# EAGLE board signal-board_v1_23 (EAGLE 7.6.0)
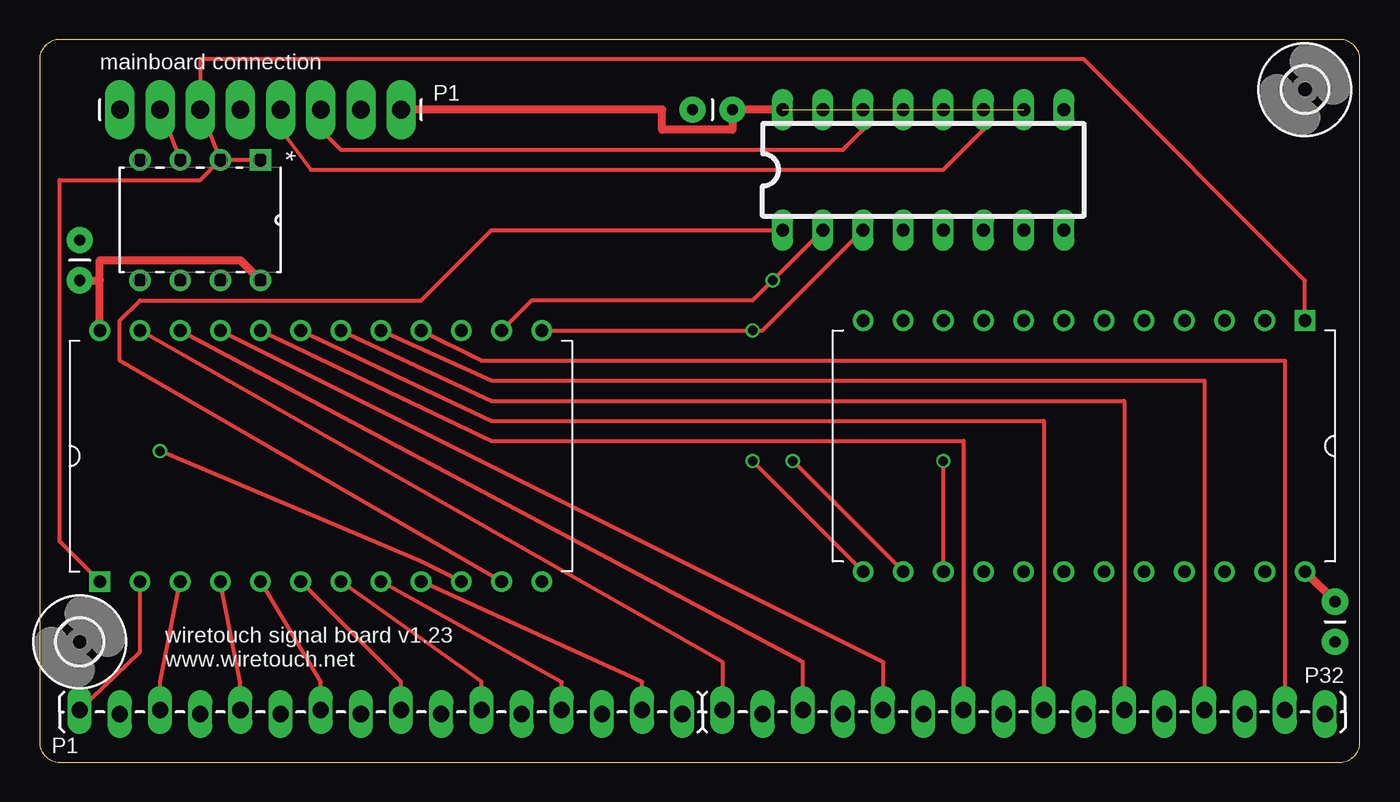
[diagram p0: board, top side]
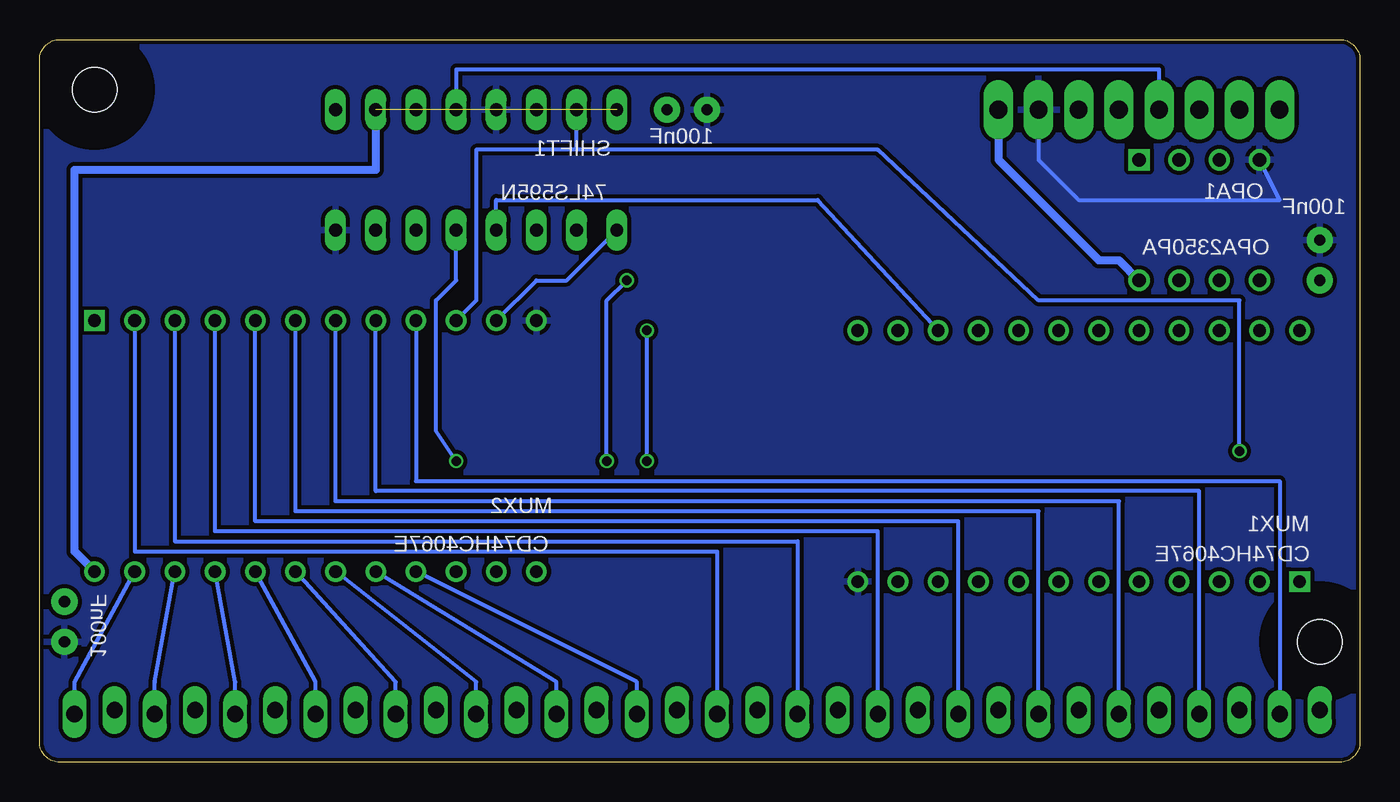
[diagram p1: board, bottom side, seen from below]

Size 83.49 x 45.71 mm. Coordinates in mm from the lower left corner, seen from the top.
Outline: 0,44.44 0,1.27 arc90 1.27,0 82.22,0 arc90 83.49,1.27 83.49,44.44 arc90 82.22,45.71 1.27,45.71 arc90 0,44.44
Copper layers (1*16): Top 0.035mm / dielectric 1.5mm / Bottom 0.035mm
Design rules "Fusion_eagle_rule_v1.1": minimum track width 6mil, minimum drill 12mil, track to track 6mil, track to pad 6mil, pad to pad 6mil, via to via 6mil, smd to smd 0mil, copper to edge 10mil, drill to drill 10mil, minimum pad ring 10mil, minimum via ring 6mil, stop-mask expansion 2mil, vias tented up to drill 100mil, thermal gap 10mil

## Footprints (pad centres in the part's own frame; a part is rotated, then mirrored left to right if it is on the bottom)
CAP-PTH-SMALL = drill 0.7 pad 1.651: 1 0,0; 2 2.54,0
1X08_LONGPADS = drill 1.118 pad 1.88 long: 1 0,0; 2 2.54,0; 3 5.08,0; 4 7.62,0; 5 10.16,0; 6 12.7,0; 7 15.24,0; 8 17.78,0
PDIP24-WIDE-CD74HC4067E = drill 0.8 square: 1 0,0 | drill 0.8: 2 2.54,0; 3 5.08,0; 4 7.62,0; 5 10.16,0; 6 12.7,0; 7 15.24,0; 8 17.78,0; 9 20.32,0; 10 22.86,0; 11 25.4,0; 12 27.94,0; 13 27.94,15.875; 14 25.4,15.875; 15 22.86,15.875; 16 20.32,15.875; 17 17.78,15.875; 18 15.24,15.875; 19 12.7,15.875; 20 10.16,15.875; 21 7.62,15.875; 22 5.08,15.875; 23 2.54,15.875; 24 0,15.875
DIP254P762X508-8 = drill 0.838 square: 1 -7.62,7.62 | drill 0.838: 2 -7.62,5.08; 3 -7.62,2.54; 4 -7.62,0; 5 0,0; 6 0,2.54; 7 0,5.08; 8 0,7.62
1X16_LOCK_LONGPADS = drill 1.016 long: 1 0,0.127; 2 2.54,-0.127; 3 5.08,0.127; 4 7.62,-0.127; 5 10.16,0.127; 6 12.7,-0.127; 7 15.24,0.127; 8 17.78,-0.127; 9 20.32,0.127; 10 22.86,-0.127; 11 25.4,0.127; 12 27.94,-0.127; 13 30.48,0.127; 14 33.02,-0.127; 15 35.56,0.127; 16 38.1,-0.127
DIL16 = drill 0.813 long: 1 -8.89,-3.81; 2 -6.35,-3.81; 3 -3.81,-3.81; 4 -1.27,-3.81; 5 1.27,-3.81; 6 3.81,-3.81; 7 6.35,-3.81; 8 8.89,-3.81; 9 8.89,3.81; 10 6.35,3.81; 11 3.81,3.81; 12 1.27,3.81; 13 -1.27,3.81; 14 -3.81,3.81; 15 -6.35,3.81; 16 -8.89,3.81
2,8 = hole 2.8: 0,0

## Placement (x,y rotation side)
C2  100nF  [CAP-PTH-SMALL]  2.54,33.02 270 top
C3  100nF  [CAP-PTH-SMALL]  81.92,7.62 90 top
C4  100nF  [CAP-PTH-SMALL]  41.27,41.27 0 top
MAINBOARD  MAINBOARD  [1X08_LONGPADS]  22.86,41.27 180 top
MUX1  CD74HC4067E  [PDIP24-WIDE-CD74HC4067E]  3.81,11.43 0 top
MUX2  CD74HC4067E  [PDIP24-WIDE-CD74HC4067E]  80.01,27.94 180 top
OPA1  OPA2350PA  [DIP254P762X508-8]  6.35,30.48 270 top
SENSORPANEL-0-15  M16LOCK_LONGPADS  [1X16_LOCK_LONGPADS]  2.54,3.17 0 top
SENSORPANEL-16-31  M16LOCK_LONGPADS  [1X16_LOCK_LONGPADS]  43.18,3.17 0 top
SHIFT1  74LS595N  [DIL16]  55.88,37.47 0 top
U$6  [2,8]  80.01,42.55 0 top
U$7  [2,8]  2.54,7.62 0 top

## Library data of the parts
C2-C4 = SparkFun-Passives
MAINBOARD SENSORPANEL-0-15 SENSORPANEL-16-31 = SparkFun-Connectors
MUX1 MUX2 = gkaindl
OPA1 = gkaindl; MPN: OPA2350PA; OC_FARNELL: 4353316; OC_NEWARK: 75C4730; PACKAGE: PDIP; SUPPLIER: Texas Instruments
SHIFT1 = SparkFun-DigitalIC
U$6 U$7 = holes

## Nets
5V: C2.2 C3.2 C4.2 MAINBOARD.1 MUX1.24 MUX2.24 OPA1.8 SHIFT1.10 SHIFT1.16
GND: C2.1 C3.1 C4.1 MAINBOARD.2 MUX1.12 MUX2.12 OPA1.4 SHIFT1.8 SHIFT1.13
N$1: MUX1.2 SENSORPANEL-0-15.1
N$2: MUX1.3 SENSORPANEL-0-15.3
N$3: MUX1.4 SENSORPANEL-0-15.5
N$4: MUX1.5 SENSORPANEL-0-15.7
N$5: MUX1.6 SENSORPANEL-0-15.9
N$6: MUX1.7 SENSORPANEL-0-15.11
N$7: MUX1.8 SENSORPANEL-0-15.13
N$8: MUX1.9 SENSORPANEL-0-15.15
N$9: MUX1.23 SENSORPANEL-16-31.1
N$10: MUX1.22 SENSORPANEL-16-31.3
N$11: MUX1.21 SENSORPANEL-16-31.5
N$12: MUX1.20 SENSORPANEL-16-31.7
N$13: MUX1.19 SENSORPANEL-16-31.9
N$14: MUX1.18 SENSORPANEL-16-31.11
N$15: MUX1.17 SENSORPANEL-16-31.13
N$16: MUX1.16 SENSORPANEL-16-31.15
N$17: MUX2.9 SENSORPANEL-0-15.2
N$18: MUX2.8 SENSORPANEL-0-15.4
N$19: MUX2.7 SENSORPANEL-0-15.6
N$20: MUX2.6 SENSORPANEL-0-15.8
N$21: MUX2.5 SENSORPANEL-0-15.10
N$22: MUX2.4 SENSORPANEL-0-15.12
N$23: MUX2.3 SENSORPANEL-0-15.14
N$24: MUX2.2 SENSORPANEL-0-15.16
N$25: MUX2.16 SENSORPANEL-16-31.2
N$26: MUX2.17 SENSORPANEL-16-31.4
N$27: MUX2.18 SENSORPANEL-16-31.6
N$28: MUX2.19 SENSORPANEL-16-31.8
N$29: MUX2.20 SENSORPANEL-16-31.10
N$30: MUX2.21 SENSORPANEL-16-31.12
N$31: MUX2.22 SENSORPANEL-16-31.14
N$32: MUX2.23 SENSORPANEL-16-31.16
N$33: MUX1.11 MUX2.11 SHIFT1.1
N$34: MUX1.10 MUX2.10 SHIFT1.15
N$36: MUX1.14 MUX2.14 SHIFT1.2
N$39: MAINBOARD.3 SHIFT1.14
N$40: MUX1.15 SHIFT1.4
N$41: MUX2.15 SHIFT1.5
N$42: MAINBOARD.4 SHIFT1.11
N$43: MUX1.13 MUX2.13 SHIFT1.3
N$44: MAINBOARD.5 SHIFT1.12
SIG_DIG: MAINBOARD.7 OPA1.3
SIG_REF: MAINBOARD.6 MUX1.1 MUX2.1 OPA1.1 OPA1.2

## Tracks (layer width: path | path; a pad name or v marks a point on that pad's centre or on a via)
5V  (1 unrouted)
  Top 0.508: SHIFT1.16 C4.2 43.81,40.01 39.37,40.01 39.37,41.27 MAINBOARD.1 | MUX1.24 3.81,30.48 | 3.81,30.48 3.81,31.75 12.7,31.75 OPA1.8 | MUX2.24 C3.2 | C2.2 3.81,30.48
  Bottom 0.508: MUX2.24 81.28,13.34 81.28,37.47 62.23,37.47 SHIFT1.10 | MAINBOARD.1 22.86,38.1 16.51,31.75 15.24,31.75 OPA1.8
GND
  Bottom 0.254: MAINBOARD.2 20.32,38.1 17.78,35.56 5.08,35.56 OPA1.4
  pour Bottom (isolate 0.254): 0,45.72 83.5,45.72 83.5,0 0,0
N$1
  Top 0.254: SENSORPANEL-0-15.1 6.35,6.99 MUX1.2
N$2
  Top 0.254: SENSORPANEL-0-15.3 7.62,5.08 MUX1.3
N$3
  Top 0.254: SENSORPANEL-0-15.5 12.7,5.08 MUX1.4
N$4
  Top 0.254: SENSORPANEL-0-15.7 17.78,5.08 MUX1.5
N$5
  Top 0.254: SENSORPANEL-0-15.9 22.86,5.08 MUX1.6
N$6
  Top 0.254: SENSORPANEL-0-15.11 27.94,5.08 MUX1.7
N$7
  Top 0.254: SENSORPANEL-0-15.13 33.02,5.08 MUX1.8
N$8
  Top 0.254: SENSORPANEL-0-15.15 38.1,5.08 MUX1.9
N$9
  Top 0.254: MUX1.23 43.18,6.35 SENSORPANEL-16-31.1
N$10
  Top 0.254: SENSORPANEL-16-31.3 48.26,6.35 MUX1.22
N$11
  Top 0.254: MUX1.21 53.34,6.35 SENSORPANEL-16-31.5
N$12
  Top 0.254: MUX1.20 28.57,20.32 58.42,20.32 SENSORPANEL-16-31.7
N$13
  Top 0.254: MUX1.19 28.57,21.59 63.5,21.59 SENSORPANEL-16-31.9
N$14
  Top 0.254: MUX1.18 28.57,22.86 68.58,22.86 SENSORPANEL-16-31.11
N$15
  Top 0.254: MUX1.17 28.57,24.13 73.66,24.13 SENSORPANEL-16-31.13
N$16
  Top 0.254: MUX1.16 27.94,25.4 78.74,25.4 SENSORPANEL-16-31.15
N$17
  Bottom 0.254: MUX2.9 59.69,17.78 5.08,17.78 SENSORPANEL-0-15.2
N$18
  Bottom 0.254: SENSORPANEL-0-15.4 10.16,17.14 62.23,17.14 MUX2.8
N$19
  Bottom 0.254: SENSORPANEL-0-15.6 15.24,16.51 64.77,16.51 MUX2.7
N$20
  Bottom 0.254: SENSORPANEL-0-15.8 20.32,15.88 67.31,15.88 MUX2.6
N$21
  Bottom 0.254: SENSORPANEL-0-15.10 25.4,15.24 69.85,15.24 MUX2.5
N$22
  Bottom 0.254: SENSORPANEL-0-15.12 30.48,14.61 72.39,14.61 MUX2.4
N$23
  Bottom 0.254: MUX2.3 74.93,13.97 35.56,13.97 SENSORPANEL-0-15.14
N$24
  Bottom 0.254: MUX2.2 77.47,13.34 40.64,13.34 SENSORPANEL-0-15.16
N$25
  Bottom 0.254: SENSORPANEL-16-31.2 45.72,3.81 45.72,5.08 MUX2.16
N$26
  Bottom 0.254: SENSORPANEL-16-31.4 50.8,3.81 50.8,5.08 MUX2.17
N$27
  Bottom 0.254: SENSORPANEL-16-31.6 55.88,3.81 55.88,5.08 MUX2.18
N$28
  Bottom 0.254: SENSORPANEL-16-31.8 60.96,3.81 60.96,5.08 MUX2.19
N$29
  Bottom 0.254: SENSORPANEL-16-31.10 66.04,3.81 66.04,5.08 MUX2.20
N$30
  Bottom 0.254: SENSORPANEL-16-31.12 71.12,3.81 71.12,5.08 MUX2.21
N$31
  Bottom 0.254: SENSORPANEL-16-31.14 76.2,3.81 76.2,5.08 MUX2.22
N$32
  Bottom 0.254: SENSORPANEL-16-31.16 81.28,3.81 81.28,5.08 MUX2.23
N$33
  Top 0.254: MUX1.11 5.08,25.4 5.08,27.94 6.35,29.21 24.13,29.21 28.57,33.66 SHIFT1.1
  Bottom 0.254: MUX2.11 52.07,30.48 50.16,30.48 SHIFT1.1
N$34  (via drill 0.6)
  Top 0.254: MUX1.10 24.13,12.7 v7.62,19.68
  Bottom 0.254: 49.53,38.73 SHIFT1.15 | 49.53,38.73 55.88,38.73 55.88,29.21 MUX2.10 | v7.62,19.68 7.62,29.21 20.32,29.21 30.48,38.73 49.53,38.73
N$36  (via drill 0.6)
  Top 0.254: SHIFT1.2 v46.35,30.48 45.09,29.21 31.11,29.21 MUX1.14 | MUX2.14 v47.62,19.05
  Bottom 0.254: v47.62,19.05 47.62,29.21 v46.35,30.48
N$39
  Top 0.254: MAINBOARD.3 17.78,40.01 19.05,38.73 50.8,38.73 52.07,40.01 SHIFT1.14
N$40
  Bottom 0.254: SHIFT1.4 54.61,35.56 34.29,35.56 MUX1.15
N$41  (via drill 0.6)
  Top 0.254: MUX2.15 v57.15,19.05
  Bottom 0.254: v57.15,19.05 58.42,20.95 58.42,29.21 57.15,30.48 SHIFT1.5
N$42
  Top 0.254: MAINBOARD.4 15.24,40.01 17.14,37.47 57.15,37.47 59.69,40.01 SHIFT1.11
N$43  (via drill 0.6)
  Top 0.254: MUX1.13 v45.09,27.3 45.72,27.3 SHIFT1.3 | MUX2.13 v45.09,19.05
  Bottom 0.254: v45.09,19.05 v45.09,27.3
N$44
  Bottom 0.254: MAINBOARD.5 12.7,43.81 57.15,43.81 SHIFT1.12
SIG_DIG
  Top 0.254: MAINBOARD.7 OPA1.3
SIG_REF
  Top 0.254: MUX1.1 1.27,13.97 1.27,36.83 10.16,36.83 OPA1.2 | OPA1.2 MAINBOARD.6 10.16,44.45 66.04,44.45 80.01,30.48 MUX2.1 | OPA1.2 OPA1.1

## Text on the board
tPlace: mainboard connection | P1 | wiretouch signal board v1.23 / www.wiretouch.net | P32 | P1